# Altium PCB LittleWing++.PcbDoc (part 2 of 2)
Units mil, origin at the board's own origin, x right, y up, seen from the top; angles counter-clockwise.
Board outline 4200 x 2200 mil, 6 copper layers (L1 - Signal, L2 - Ground, L3 - Power, L4 - Signal, L5 - Ground, L6 - Signal), stack 60.567 mil thick; 70 components, 84 nets, 372 pads, 438 vias.
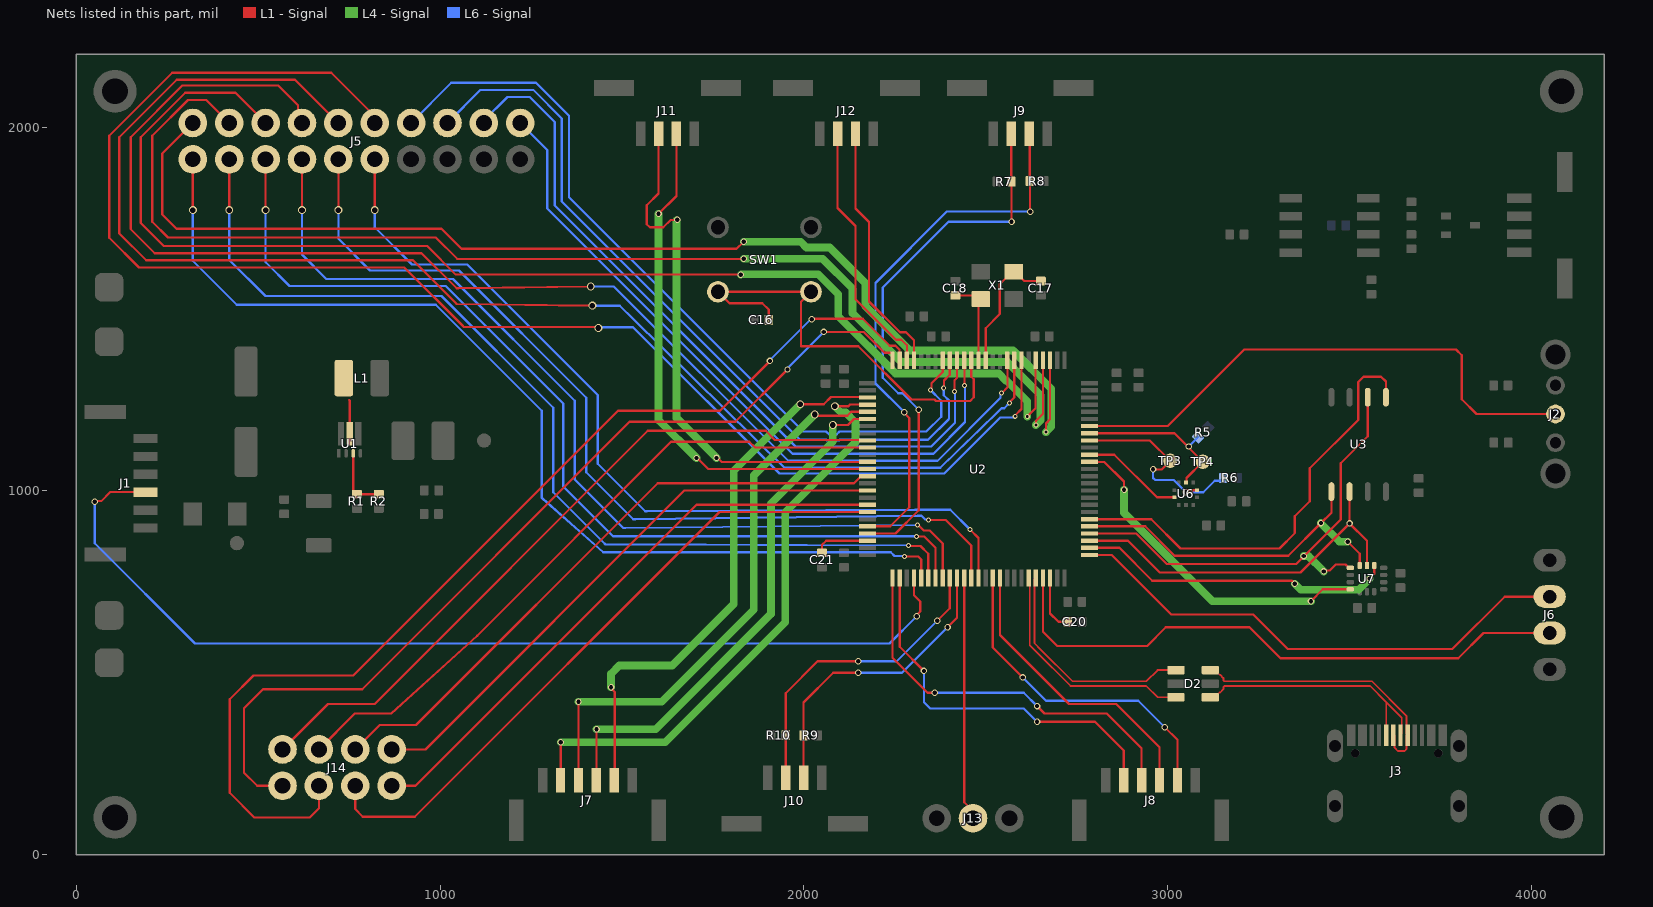
[diagram p6: the nets of this part, all layers, seen from the top]

## Via types
v1: diameter 17.72, hole 11.81, L1 - Signal to L6 - Signal, tented both sides, 240 vias
v2: diameter 21.65, hole 15.75, L1 - Signal to L6 - Signal, tented both sides, 158 vias
v3: diameter 17.72, hole 11.81, L1 - Signal to L6 - Signal, 20 vias
v4: diameter 13.78, hole 7.87, L1 - Signal to L6 - Signal, tented both sides, 20 vias

## Nets (pads, with @x,y where several pads share a name; then routed paths per layer and width w, separated by ;. In a path a pad name is that pad's centre, name@x,y a point inside that pad or via, vN(x,y) a via of type N, cw(c..) or ccw(c..) an arc to the next point about the centre after c; other vN are vias at no path point) (continued)
GPIO_5: J5.5 U2.63 | length 2421.8
  L1 - Signal w6.16: v2(820.28,1771.65) J5.5@820.28,1911.42 ; v4@2457.08,893.32 2480,870.39 U2.63@2480,760.79
  L6 - Signal w6.16: v2(820.28,1771.65) 820.28,1724.41 922.64,1622.05 1074.8,1622.05 1433.07,1263.78 1433.07,1074.8 1563.81,944.06 1568.92,944.06 2305.32,947.82 2305.35,947.86 2329.72,947.86 2329.8,947.78 2402.61,947.78 v4(2456.69,893.7)
GPIO_6: J5.6 U2.62 | length 2520.6
  L1 - Signal w6.16: v2(720.28,1771.65) J5.6@720.28,1911.42 ; v4(2342.52,919.95) 2390.05,919.95 2460.31,849.69 U2.62@2460.31,760.79
  L6 - Signal w6.16: 720.28,1704.72 v2(720.28,1771.65) ; 720.47,1704.72 720.47,1692.91 807.5,1605.89 1051.59,1605.89 1401.57,1255.91 1401.57,1051.18 1531,921.75 1536.11,921.75 2312.05,931.69 2323.03,931.7 2333.32,921.41 2341.06,921.41 v4(2342.52,919.95)
GPIO_7: J5.7 U2.58 | length 2577
  L1 - Signal w6.16: v2(620.28,1771.65) J5.7@620.28,1911.42 ; v4(2312.38,905.98) 2314.59,905.98 2329.57,891 2346,891 2381.57,855.42 U2.58@2381.57,760.79
  L6 - Signal w6.16: v2(620.28,1771.65) 620.28,1649.61 687.2,1582.68 1035.43,1582.68 1370.08,1248.03 1370.08,1031.5 1502.13,899.44 1503.94,897.64 1509.04,897.64 v4(2312.38,905.98)
GPIO_8: J5.8 U2.57 | length 2666.1
  L1 - Signal w6.16: v2(520.28,1771.65) J5.8@520.28,1911.42 ; v4(2309.77,874.43) 2331.11,874.43 2361.89,843.65 U2.57@2361.89,760.79
  L6 - Signal w6.16: v2(520.28,1771.65) 520.28,1628.74 586.02,1562.99 1015.75,1562.99 1338.58,1240.16 1338.58,1011.81 1475.07,875.33 2308.87,875.33 v4(2309.77,874.43)
GPIO_9: J5.9 U2.56 | length 2734
  L1 - Signal w6.16: v2(420.28,1771.65) J5.9@420.28,1911.42 ; v4(2287.13,849.61) 2288.02,848.71 2320.58,848.71 2342.2,827.09 U2.56@2342.2,760.79
  L6 - Signal w6.16: v2(420.28,1771.65) 420.28,1634.84 519.69,1535.43 1003.94,1535.43 1311.02,1228.35 1311.02,996.06 1452.26,854.82 1454.07,853.02 v4(2287.13,849.61)
GPIO_10: J5.10 U2.55 | length 2807
  L1 - Signal w6.16: v2(320.28,1771.65) J5.10@320.28,1911.42 ; v4(2276.78,819.69) 2314.16,819.69 2322.52,811.34 U2.55@2322.52,760.79
  L6 - Signal w6.16: v2(320.28,1771.65) 320.28,1632.48 440.94,1511.81 988.19,1511.81 1279.53,1220.47 1279.53,981.32 1281.33,979.52 1281.46,979.39 1448,831 2239,831 2249,821 2275.48,821 v4(2276.78,819.69)
GPIO_11: J5.11 U2.3 | length 3309.7
  L1 - Signal w6.16: J5.11@320.28,2011.42 236.22,1927.36 236.22,1759.84 275.59,1720.47 1003.94,1720.47 1059.06,1665.35 1814.96,1665.35 v3(1834.65,1685.04) ; v4(2665.35,1161.42) 2665.35,1185.04 2676.85,1196.53 U2.3@2676.85,1359.21
  L4 - Signal w21.18: v3(1834.65,1685.04) 1990.96,1685.04 2007.02,1668.98 2071.18,1668.98 2169.29,1570.87 2169.29,1507.87 2291.34,1385.83 2574.8,1385.83 2680,1280.63 2680,1176.06 v4(2665.35,1161.42)
GPIO_12: J5.12 U2.4 | length 3466.9
  L1 - Signal w6.16: J5.12@420.28,2011.42 356.89,2074.8 307.09,2074.8 208.66,1976.38 208.66,1740.16 251.97,1696.85 988.19,1696.85 1047.24,1637.8 v3(1834.65,1637.8) ; v4(2637.8,1181.1) 2637.8,1192.9 2657.16,1212.27 U2.4@2657.16,1359.21
  L4 - Signal w21.18: v3(1834.65,1637.8) 2051.18,1637.8 2133.86,1555.12 2133.86,1488.19 2267.72,1354.33 2559.06,1354.33 2650.7,1262.69 2650.7,1194 v4(2637.8,1181.1)
GPIO_13: J5.13 U2.5 | length 3546.3
  L1 - Signal w6.16: J5.13@520.28,2011.42 437.2,2094.49 299.21,2094.49 177.17,1972.44 177.17,1736.22 240.16,1673.23 964.57,1673.23 1043.31,1594.49 v3(1826.77,1594.49) ; v4(2614.17,1204.47) 2626.82,1217.37 2630.43,1220.98 2636.78,1227.33 2636.78,1358.51 U2.5@2637.48,1359.21
  L4 - Signal w21.18: v3(1826.77,1594.49) 1827.68,1595.39 2039.63,1595.39 2094.49,1540.53 2094.49,1480.32 2251.97,1322.83 2535.43,1322.83 2555.12,1303.15 2557.17,1303.15 2614.17,1246.15 2614.17,1204.69 v4(2614.17,1204.47)
GPIO_14: J5.14 U2.9 | length 3687.6
  L1 - Signal w6.16: J5.14@620.28,2011.42 609.26,2022.43 609.26,2060.03 555.12,2114.17 291.34,2114.17 149.61,1972.44 149.61,1719.58 215.65,1653.54 948.82,1653.54 1045.44,1556.92 1050.54,1556.92 v2(1414,1562) ; v4(2543.71,1268.58) 2560,1284.86 2560,1357.95 U2.9@2558.74,1359.21
  L6 - Signal w6.16: v2(1414,1562) 1477.37,1562 1956.69,1082.68 2367.68,1082.68 2540.75,1255.75 2540.75,1265.61 v4(2543.71,1268.58)
GPIO_15: J5.15 U2.8 | length 3887
  L1 - Signal w6.16: J5.15@720.28,2011.42 601.36,2130.33 276,2130.33 118.11,1972.44 118.11,1707.77 192.03,1633.86 925.2,1633.86 1043.49,1515.56 1045.26,1513.79 v2(1418.53,1509.17) ; v4(2565.52,1241.38) 2565.52,1243.96 2578.43,1256.86 U2.8@2578.43,1359.21
  L6 - Signal w6.16: v2(1418.53,1509.17) 1494,1509.17 1530.32,1472.85 1946.61,1063.82 2372.29,1063.82 2374.84,1063.82 2532.01,1216.28 2543.08,1227.35 2551.17,1227.35 2565.21,1241.38 v4(2565.52,1241.38)
GPIO_16: J5.16 U2.7 | length 4137.1
  L1 - Signal w6.16: J5.16@820.28,2011.42 820.28,2030.12 700.79,2149.61 263.78,2149.61 90.55,1976.38 90.55,1695.96 172.34,1614.17 901.57,1614.17 1062.78,1452.97 1065,1450.74 1432.26,1450.74 v2(1435,1448) ; v4(2580.95,1205) 2580.95,1207.62 2598.11,1224.78 U2.7@2598.11,1359.21
  L6 - Signal w6.16: v2(1435,1448) 1436.96,1449.96 1530.35,1449.96 1932.66,1047.66 2386.24,1047.66 2540.62,1202.04 2577.98,1202.04 v4(2580.95,1205)
GPIO_17: J5.17 U2.18 | length 2236.1
  L1 - Signal w6.16: v4(2348,1277) 2350.96,1279.96 2350.96,1295.96 2381.57,1326.57 U2.18@2381.57,1359.21
  L6 - Signal w6.16: J5.17@920.28,2011.42 1030.91,2122.05 1263.78,2122.05 1354.33,2031.5 1354.33,1807.09 1998.2,1163.22 2061.08,1163.22 2068.95,1155.35 2090.26,1155.35 2098.13,1163.22 2336.45,1163.22 2377.33,1204.1 2377.33,1247.67 v4(2348,1277)
GPIO_18: J5.18 U2.17 | length 2147.7
  L1 - Signal w6.16: v4(2384.39,1283.15) 2385.22,1283.98 2385.22,1303.22 2401.26,1319.26 U2.17@2401.26,1359.21
  L6 - Signal w6.16: J5.18@1020.28,2011.42 1111.22,2102.36 1255.91,2102.36 1334.65,2023.62 1334.65,1795.28 1986.38,1143.54 1989.66,1140.26 2061.19,1140.26 2062.26,1139.19 2096.95,1139.19 2098.02,1140.26 2341.05,1140.26 2397.31,1196.52 2399.11,1198.32 2399.11,1248.74 2384.78,1263.08 2384.78,1282.76 v4(2384.39,1283.15)
GPIO_19: J5.19 U2.16 | length 2063.1
  L1 - Signal w6.16: v4(2414.42,1272.94) 2414.42,1304.42 2420.94,1310.95 U2.16@2420.94,1359.21
  L6 - Signal w6.16: J5.19@1120.28,2011.42 1120.28,2017.91 1185.04,2082.68 1246.44,2082.68 1314.96,2014.15 1314.96,1784.23 1977.14,1122.05 2350.39,1122.05 2415.27,1186.93 2415.27,1272.09 v4(2414.42,1272.94)
GPIO_20: J5.20 U2.15 | length 1900.1
  L1 - Signal w6.16: U2.15@2440.63,1359.21 2441.33,1338.67 v4(2441.33,1289.61)
  L6 - Signal w6.16: J5.20@1220.28,2011.42 1294.45,1937.24 1294.45,1776.42 1968.5,1102.36 2356.04,1102.36 2443.04,1189.37 2443.04,1287.89 v4(2441.33,1289.61)
I2C1_SCL: R6.1 TP3.1 U2.92 U6.2 | length 584.8
  L1 - Signal w6.16: U2.92@2785.12,1138.74 2951.02,1138.74 TP3.1@3007.09,1082.68 2983.46,1059.06 v3(2959.84,1059.06) ; v3(3050.39,996.06) 3056.3,1001.97 U6.2@3081.39,1001.97
  L6 - Signal w6.16: v3(2959.84,1059.06) 2959.84,1035.43 2965.62,1029.66 3016.8,1029.66 v3(3050.39,996.06) 3097.64,996.06 3129.26,1027.69 3145.01,1027.69 R6.1@3152.76,1035.43
I2C1_SDA: R5.1 TP4.1 U2.93 U6.4 | length 456.4
  L1 - Signal w6.16: U2.93@2785.12,1158.43 3018.58,1158.43 TP4.1@3096.85,1080.16 3052,1035.31 3052,1024.73 U6.4@3050.39,1023.13
  L6 - Signal w6.16: v3(3058.27,1122.05) R5.1@3083.72,1147.5
I2C2_SCL: J9.2 R8.1 U2.46 | length 1513
  L1 - Signal w6.16: U2.46@2174.88,902.52 2237.36,902.52 2289.57,954.72 2289.57,1200.56 2275.59,1214.53 v3(2275.59,1216.54) ; J9.2@2619.61,1981.7 2621.26,1980.05 R8.1@2621.26,1851.38 2621.65,1850.98 2621.65,1768.11 v1(2622.05,1767.72)
  L6 - Signal w6.16: v3(2275.59,1216.54) 2196.85,1295.28 2196.85,1571.65 2392.91,1767.72 v1(2622.05,1767.72)
I2C2_SDA: J9.3 R7.1 U2.47 | length 1499.2
  L1 - Signal w6.16: U2.47@2174.88,882.84 2252.13,882.84 2316,946.71 v3(2316,1223) ; J9.3@2570.39,1981.7 2570.08,1981.39 R7.1@2570.08,1850.39 2570.47,1850 2570.47,1740.55 v1(2570.87,1740.16)
  L6 - Signal w6.16: v3(2316,1223) 2270.88,1268.12 2259.44,1268.12 2216.54,1311.02 2216.54,1559.05 2397.64,1740.16 v1(2570.87,1740.16)
I2C4_SCL: J10.2 R10.1 U2.59 | length 861.4
  L1 - Signal w6.16: J10.2@1950.39,213.85 1950,214.24 R10.1@1950,328.74 1950,443.9 2037.6,531.5 v1(2149.61,531.5) ; v1(2366.34,642.72) 2401.26,677.64 U2.59@2401.26,760.79
  L6 - Signal w6.16: v1(2149.61,531.5) 2255.12,531.5 v1(2366.34,642.72)
I2C4_SDA: J10.3 R9.1 U2.60 | length 832.6
  L1 - Signal w6.16: J10.3@1999.61,213.85 1999.21,214.24 R9.1@1999.21,327.76 1999.21,418.31 2080.91,500 v1(2149.61,500) ; v1(2395,625) 2420.94,650.94 U2.60@2420.94,760.79
  L6 - Signal w6.16: v1(2149.61,500) 2270,500 v1(2395,625)
IMU_INT: U2.89 U7.4 | length 939.2
  L1 - Signal w6.16: U2.89@2785.12,1079.68 2826.02,1079.68 2880.12,1025.59 v3(2880.12,1002.95) ; v1(3393.9,696.85) 3426.38,729.33 U7.4@3502.17,729.33
  L4 - Signal w21.18: v3(2880.12,1002.95) 2880.12,939.96 3123.23,696.85 v1(3393.9,696.85)
MCU_BOOT: J2.COM U2.94 | length 1512.8
  L1 - Signal w6.16: U2.94@2785.12,1178.11 3000.16,1178.11 3210.83,1388.78 3792.52,1388.78 3808.27,1373.03 3808.27,1251.97 3848.94,1211.3 J2.COM@4066.22,1211.3
MCU_RST: C16.2 SW1.2 U2.14 | length 1251.2
  L1 - Signal w6.16: C16.2@1903.15,1470.04 1903.15,1498.43 1885.83,1515.75 1795.28,1515.75 SW1.2@1763.78,1547.24 SW1.2@2019.69,1547.24 1992.13,1519.69 1992.13,1397.64 2149.61,1397.64 2296.12,1251.12 2359.25,1251.12 2363.15,1247.23 2457.23,1247.23 2467.05,1257.05 2467.05,1306.86 2460.31,1313.59 U2.14@2460.31,1359.21
OSC_IN: C17.2 U2.12 X1.1 | length 362.1
  L1 - Signal w6.16: U2.12@2499.69,1359.21 2499.69,1447.32 2538.3,1485.93 2538.3,1553.17 2538.58,1553.45 2538.58,1567.72 2573.03,1602.17 X1.1@2576.97,1602.17 2580.91,1602.17 2606.02,1577.05 C17.2@2651.42,1577.05
OSC_OUT: C18.2 U2.13 X1.3 | length 245
  L1 - Signal w6.16: C18.2@2416.42,1537.36 2476.42,1537.36 X1.3@2486.42,1527.36 2480,1520.94 U2.13@2480,1359.21
PRESS_INT: U2.90 U6.7 | length 282.9
  L1 - Signal w6.16: U2.90@2785.12,1099.37 2853.46,1099.37 2970.67,982.16 2993.76,982.16 2993.89,982.28 U6.7@3019.39,982.28
REG_FB: R1.1 R2.2 U1.3 | length 177.5
  L1 - Signal w6.16: U1.3@761.22,1103.23 761.22,999.48 769.95,990.75 R1.1@771.38,990.75 R2.2@831.38,990.75
REG_SW: L1.1 U1.6 | length 94.2
  L1 - Signal w6.16: 750,1250 751.38,1248.62 U1.6@751.38,1156.38
SPI1_CS: J7.5 U2.28 | length 1522.2
  L1 - Signal w6.16: v1(1470,460) 1470,456.87 1480,446.87 1480,216.3 J7.5@1478.82,215.12 ; v2(1990,1238.19) 2054.46,1238.19 2074.5,1258.23 2173.51,1258.23 U2.28@2174.88,1256.85
  L4 - Signal w21.18: v1(1470,460) 1470,497.59 1492.41,520 1638.11,520 1807.09,688.98 1807.09,1055.28 v2(1990,1238.19)
SPI1_MISO: J7.3 U2.30 | length 1559.6
  L1 - Signal w6.16: J7.3@1380.39,204.39 v1(1380.39,420) ; v2(2030,1210) 2034.19,1210 2037.4,1206.79 2119.55,1206.79 2130.24,1217.48 U2.30@2174.88,1217.48
  L4 - Signal w21.18: v1@1380,420 1608.98,420 1862.2,673.23 1862.2,1042.2 v2(2030,1210)
SPI1_MOSI: J7.4 U2.31 | length 1443.6
  L1 - Signal w6.16: J7.4@1429.61,204.39 1430,204.79 v1(1430,345) ; v2(2079.61,1181.07) 2121.07,1181.07 2137.8,1197.8 U2.31@2174.88,1197.8
  L4 - Signal w21.18: v1(1430,345) 1593.03,345 1909.45,661.42 1909.45,964.57 2079.61,1134.72 v2(2079.61,1181.07)
SPI1_SCK: J7.2 U2.29 | length 1644.2
  L1 - Signal w6.16: J7.2@1331.18,215.12 1331.89,215.83 v1(1331.89,309.06) ; v2(2085.15,1232.51) 2122.41,1232.51 2127.07,1237.16 U2.29@2174.88,1237.16
  L4 - Signal w21.18: v1(1331.89,309.06) 1619.29,309.06 1948.82,638.58 1948.82,940.94 2141.73,1133.86 2141.73,1188.98 2114.31,1216.4 2101.39,1216.4 2085.28,1232.51 v2(2085.15,1232.51)
SPI3_MISO: U2.79 U3.2 U7.1 | length 1299.8
  L1 - Signal w6.16: U2.79@2785.12,882.84 2913.62,882.84 2997.24,799.21 3353.54,799.21 3475.59,921.26 3475.59,1075.79 3550.2,1150.39 U3.2@3550.2,1257.48 ; v1(3429.33,778.54) 3431.54,780.75 3445.2,780.75 3461.82,797.37 3489.24,797.37 3498.23,788.39 U7.1@3502.17,788.39
  L4 - Signal w21.18: v1(3374.21,820.87) 3387.01,820.87 v1(3429.33,778.54)
SPI3_MOSI: U2.80 U3.5 U7.14 | length 979.4
  L1 - Signal w6.16: U2.80@2785.12,902.52 2938.23,902.52 3018.9,821.85 3331.89,821.85 v1(3421.46,911.42) 3450.2,940.16 U3.5@3450.2,998.03 ; v1(3495.28,860.24) 3528.35,827.17 U7.14@3528.35,794.88
  L4 - Signal w21.18: v1(3421.46,911.42) 3472.64,860.24 v1(3495.28,860.24)
SPI3_SCK: U2.78 U3.6 U7.13 | length 1030.2
  L1 - Signal w6.16: U2.78@2785.12,863.15 2890.98,863.15 2978.54,775.59 3365.35,775.59 v1(3500.2,910.43) ; U3.6@3500.2,998.03 v1(3500.2,910.43) ; U7.13@3548.03,794.88 3548.03,862.6 v1(3500.2,910.43)
SPI_CS1: U2.81 U3.1 | length 1234.1
  L1 - Signal w6.16: U2.81@2785.12,922.2 2954.96,922.2 3035.63,841.54 3307.28,841.54 3349.61,883.86 3349.61,930.12 3390.94,971.46 3390.94,1062.01 3523.82,1194.88 3523.82,1299.21 3538.58,1313.98 3586.81,1313.98 3600.2,1300.59 U3.1@3600.2,1257.48
SPI_CS2: U2.77 U7.12 | length 871.5
  L1 - Signal w6.16: U2.77@2785.12,843.46 2867.36,843.46 2957.87,752.95 3341.73,752.95 v1(3349.61,745.08) ; v1(3555.31,758.86) 3555.31,759.65 3567.72,772.05 U7.12@3567.72,794.88
  L4 - Signal w21.18: v1(3349.61,745.08) 3366.1,728.58 3525.04,728.58 v1(3555.31,758.86)
SWD_SWCLK: J6.3 U2.76 | length 1432.2
  L1 - Signal w6.16: U2.76@2785.12,823.78 2846.22,823.78 3010,660 3235,660 3330,565 3782.72,565 3926.97,709.25 J6.3@4050.39,709.25
SWD_SWDIO: J6.2 U2.72 | length 1642.4
  L1 - Signal w6.16: U2.72@2657.16,760.79 2657.16,612.84 2696.18,573.82 2943.82,573.82 2995,625 3225,625 3310,540 3799.06,540 3868.31,609.25 J6.2@4050.39,609.25
TIM1_PWM1: J14.4 U2.41 | length 1603
  L1 - Signal w6.16: J14.4@866.73,289.17 959.65,289.17 1671.42,1000.94 U2.41@2174.88,1000.94
TIM1_PWM2: J14.5 U2.43 | length 1628.1
  L1 - Signal w6.16: J14.5@866.73,189.17 932.48,189.17 1704.88,961.58 U2.43@2174.88,961.58
TIM1_PWM3: J14.3 U2.39 | length 1719.3
  L1 - Signal w6.16: J14.3@766.73,289.17 833.86,356.3 933.5,356.3 1598.2,1021 2137.85,1021 2157.17,1040.32 U2.39@2174.88,1040.32
TIM1_PWM4: J14.6 U2.44 | length 1827.7
  L1 - Signal w6.16: J14.6@766.73,189.17 766.73,125.2 787.6,104.33 930.32,104.33 1767.87,941.89 U2.44@2174.88,941.89
TIM2_PWM1: J14.8 U2.25 | length 2552.9
  L1 - Signal w6.16: J14.8@566.73,189.17 497.05,189.17 460.83,225.39 460.83,402.56 512.99,454.72 785.63,454.72 1520.91,1190 1811.26,1190 v1(1954.92,1333.66) ; v3(2054.33,1437.01) 2164.57,1437.01 2221.82,1379.75 2240.96,1379.75 2243.78,1376.93 U2.25@2243.78,1359.21
  L6 - Signal w6.16: v1@1953.94,1335.63 1953.94,1336.61 v3(2054.33,1437.01)
TIM2_PWM2: J14.7 U2.24 | length 2945.2
  L1 - Signal w6.16: J14.7@666.73,189.17 666.73,127.17 641.93,102.36 489.37,102.36 421.46,170.28 421.46,427.17 486.86,492.57 761.47,492.57 1488.9,1220 1769.41,1220 v1(1906.69,1357.28) ; v3(2021.85,1471.46) 2023.82,1473.43 2161.61,1473.43 2235.85,1399.19 2251.83,1399.19 2262.77,1388.25 2262.77,1359.91 U2.24@2263.47,1359.21
  L6 - Signal w6.16: v1@1903.74,1356.3 2018.9,1471.46 v3(2021.85,1471.46)
TIM3_PWM1: J14.2 U2.35 | length 1859
  L1 - Signal w6.16: J14.2@666.73,289.17 765.35,387.8 865.75,387.8 1101.64,601.65 1101.85,601.85 1635,1135 1850,1135 1865.94,1119.05 U2.35@2174.88,1119.05
TIM3_PWM2: J14.1 U2.34 | length 1981.8
  L1 - Signal w6.16: J14.1@566.73,289.17 691.93,414.37 820.08,414.37 1570.71,1165 1895,1165 1920,1140 2173.62,1140 U2.34@2174.88,1138.74
UART4_RX: J12.3 U2.23 | length 705.7
  L1 - Signal w6.16: J12.3@2092.72,1977.33 2092.72,1777.56 2141.93,1728.35 2141.93,1526.57 2253.15,1415.35 2267.91,1415.35 2283.15,1400.12 U2.23@2283.15,1359.21
UART4_TX: J12.2 U2.22 | length 694.6
  L1 - Signal w6.16: J12.2@2141.93,1977.33 2141.93,1776.57 2179.33,1739.17 2179.33,1520.67 2263.98,1436.02 2280.71,1436.02 2302.84,1413.9 U2.22@2302.84,1359.21
UART5_CTS: J8.4 U2.66 | length 793.6
  L1 - Signal w6.16: U2.66@2539.06,760.79 2539.06,603.86 2728.54,414.37 2858.46,414.37 2977.64,295.2 J8.4@2977.64,225
UART5_RTS: J8.5 U2.65 | length 894.7
  L1 - Signal w6.16: U2.65@2519.37,760.79 2519.37,569.41 v1(2601.57,487.2) ; v1(2992.32,350.39) 3026.85,315.87 J8.5@3026.85,225
  L6 - Signal w6.16: v1(2601.57,487.2) 2665.55,423.23 2919.49,423.23 v1(2992.32,350.39)
UART5_RX: J8.3 U2.51 | length 1074.6
  L1 - Signal w6.16: U2.51@2243.78,760.79 2243.78,541.22 2340,445 v1(2360,445) ; v1(2640.94,408.46) 2661.61,387.8 2832.87,387.8 2928.43,292.24 J8.3@2928.43,225
  L6 - Signal w6.16: v1(2360,445) 2604.41,445 v1(2640.94,408.46)
UART5_TX: J8.2 U2.52 | length 1034.7
  L1 - Signal w6.16: U2.52@2263.47,760.79 2263.47,571.54 v1(2330,505) ; v1(2640.94,365.16) 2800.39,365.16 2879.21,286.34 J8.2@2879.21,225
  L6 - Signal w6.16: v1(2330,505) 2330,419.21 2347.64,401.57 2604.53,401.57 v1(2640.94,365.16)
UART7_RX: J11.3 U2.37 | length 1473.5
  L1 - Signal w6.16: J11.3@1600.39,1976.7 1600.39,1817.72 1568.11,1785.43 1568.11,1733.27 1576.97,1724.41 1613.39,1724.41 1633.67,1744.69 1651.39,1744.69 v3(1651.77,1745.08) ; v1(1759.84,1090.55) 1762.9,1090.55 1774.17,1079.28 1976.64,1079.28 1977.05,1079.68 U2.37@2174.88,1079.68
  L4 - Signal w21.18: v3@1649.8,1743.11 1649.8,1200.59 v1(1759.84,1090.55)
  L6 - Signal w6.16: v3@1649.8,1743.11 v3(1651.77,1745.08)
UART7_TX: J11.2 U2.38 | length 1432.5
  L1 - Signal w6.16: v3(1600.59,1761.81) 1649.61,1810.83 J11.2@1649.61,1976.7 ; v1(1704.72,1090.31) 1707.13,1090.31 1735.64,1061.8 1737.44,1060 U2.38@2174.88,1060
  L4 - Signal w21.18: v3(1600.59,1761.81) 1600.59,1194.45 v1(1704.72,1090.31)
UART9_RX: J13.2 U2.61 | length 670.9
  L1 - Signal w6.16: U2.61@2440.63,760.79 2440.63,144.01 2465,119.64 J13.2@2465,100
USB_CONN_N: D2.1 J3.A7 J3.B7 | length 716.1
  L1 - Signal w4.88: D2.1@3117.24,432.6 3129.33,432.6 3142.48,445.75 3144.29,445.75 3153.31,454.77 3153.31,460.7 3156.17,463.56 3308.5,463.56 3556.46,463.56 3600.75,419.27 ; J3.B7@3600.75,329.88 3600.75,419.27 ; J3.A7@3640.12,329.88 3643.52,333.28 3643.52,376.5 3600.75,419.27
USB_CONN_P: D2.3 J3.A6 J3.B6 | length 765.1
  L1 - Signal w4.88: D2.3@3117.24,507.4 3129.33,507.4 3142.48,494.25 3144.29,494.25 3153.31,485.23 3153.31,479.3 3156.17,476.44 3313.84,476.44 3561.8,476.44 3656.4,381.84 3656.4,333.28 3659.8,329.88 3656.34,326.42 3656.34,289.8 3651.54,285 3632.68,285 3623.9,293.78 3623.9,326.42 J3.A6@3620.43,329.88
USBD_N: D2.6 U2.70 | length 647.4
  L1 - Signal w4.88: U2.70@2617.8,760.79 2621.2,757.39 2621.2,575.59 2636.34,560.45 2733.22,463.56 2941.44,463.56 2972.4,432.6 D2.6@3022.76,432.6
USBD_P: D2.4 U2.71 | length 626.1
  L1 - Signal w4.88: U2.71@2637.48,760.79 2634.08,757.39 2634.08,580.92 2650,565 2738.56,476.44 2941.44,476.44 2972.4,507.4 D2.4@3022.76,507.4
VCAP1: C20.2 U2.73 | length 155.8
  L1 - Signal w6.16: U2.73@2676.85,760.79 2676.85,662.91 2699.76,640 C20.2@2725.31,640
VCAP2: C21.2 U2.48 | length 151.8
  L1 - Signal w6.16: C21.2@2050,829.69 2050,851.97 2061.22,863.19 2174.84,863.19 U2.48@2174.88,863.15
VOLTAGE_DATA: J1.4 U2.54 | length 2777.8
  L1 - Signal w6.16: v1(50.39,970.47) 51.76,971.84 68.49,971.84 93.43,996.77 J1.4@181.5,996.77 ; U2.54@2302.84,760.79 2302.84,713.23 2320.21,695.86 2320.21,668.61 2310.24,658.64 v1(2310.24,655.51)
  L6 - Signal w6.16: v1(50.39,970.47) 50.39,856.3 325.98,580.71 2235.43,580.71 v1(2310.24,655.51)
pads on no net: D2.5 J1. J2.M1 J2.M2 J3.A4B9 J3.A5 J3.A8 J3.B4A9 J3.B5 J3.B8 J3.MH J4.5 J4.6 J7. J8. J9.5 J9.6 J10.5 J10.6 J11.5 J11.6 J12.5 J12.6 U1.2 U2.1 U2.2 U2.32 U2.33 U2.36 U2.40 U2.42 U2.45 U2.84 U2.85 U2.86 U2.87 U2.88 U2.97 U2.98

## Polygon pours and split planes (outlines as drawn)
+3V3 on L3 - Power "+3V3_L03_P006" (solid, pour order 6): 0,2200 4200,2200 4200,0 0,0
+5V on L3 - Power "+5V_L03_P001" (solid, pour order 1): 376.18,787.89 328.29,740 50,740 25,715 25,470 50,445 275,445 390,560 429.37,560 433.18,556.19 572.05,417.32 909.65,417.32 999.21,327.76 999.21,165.35 1101.57,62.99 2174.41,62.99 2334.84,223.43 2596.65,223.43 2756.1,63.98 3316.14,63.98 3427.36,175.2 3938.19,175.2 3986.42,223.43 3986.42,403.54 3935.24,454.72 3869.29,454.72 3856.5,441.93 3891.93,406.5 3891.93,267.72 3854.53,230.32 3365.35,230.32 3250.2,115.16 3033.66,115.16 2983.46,165.35 2755.12,165.35 2637.01,283.46 2311.22,283.46 2156.69,128.94 1209.84,128.94 1082.87,255.91 1082.87,348.43 947.05,484.25 738.39,484.25 485.43,737.2 485.43,927.17 524.8,966.54 638.98,966.54 652.76,980.32 652.76,1119.09 603.06,1119.09 569.09,1081.69 495.28,1081.69 376.18,962.6
+5V on L3 - Power "+5V_L03_P003" (solid, pour order 3): 3637.01,1489.17 3328.94,1489.17 3190.16,1627.95 2939.17,1627.95 2826.97,1740.16 2826.97,1926.18 2698.03,2055.12 1427.36,2055.12 1354.33,1960.63 1335.83,1939.96 1335.83,1840.55 1232.97,1745.57 1248.23,1667.32 1311.22,1667.32 1416.54,1772.64 1416.54,1887.8 1474.61,1945.87 2711.81,1945.87 2759.06,1898.62 2759.06,1668.31 2885.04,1542.32 3171.46,1542.32 3319.09,1394.68 3637.01,1394.68
+5V on L3 - Power "+5V_L03_P004" (solid, pour order 4): 652.76,1119.09 652.76,1191.93 638.98,1213.58 638.98,1221.46 638.98,1424.21 807.28,1592.52 1236.42,1592.52 1311.22,1667.32 1248.23,1730.32 1248.23,1752.95 1240.35,1752.95 1159.65,1672.24 723.62,1672.24 599.61,1548.23 603.06,1119.09 586.08,1100.39
+5V on L3 - Power "+5V_L03_P002" (solid, pour order 2): 3947.05,442.91 3886.02,503.94 3886.02,1000.98 3811.22,1075.79 3811.22,1385.83 3904.72,1479.33 3904.72,1557.09 3876.18,1585.63 3789.57,1585.63 3693.11,1489.17 3637.01,1489.17 3637.01,1394.68 3726.57,1305.12 3726.57,1086.61 3812.2,1000.98 3812.2,486.22 3871.26,427.17
GND on L2 - Ground "GND_L02_P005" (solid, pour order 5): 0,2200 4200,2200 4200,0 0,0
GND on L5 - Ground "GND_L05_P008" (solid, pour order 8): 0,2200 4200,2200 4200,0 0,0

## Keep-outs
Keep-Out Layer:
  the board outline again, w19.68

## Other copper
L1 - Signal:
  region net +5V: 390.94,977.36 406.69,993.11 406.69,1198.82 431.3,1223.43 712.8,1223.43 732.48,1202.76 732.48,1124.73 722.64,1112.2 722.64,912.4 717.72,907.48 713.78,907.48 638.98,907.48 586.81,959.65 535.63,959.65 513.98,937.99 513.98,856.3 484.45,826.77 406.69,826.77 390.94,842.52
  region net +3V3: 812.2,1387.8 830.71,1406.3 830.71,1437.01 771.65,1496.06 259.84,1496.06 181.1,1417.32 181.1,1374.02 145.67,1338.58 43.31,1338.58 25,1356.89 25,1603.74 43.31,1622.05 118.11,1622.05 173.23,1566.93 783.46,1566.93 834.65,1515.75 877.95,1515.75 919.49,1474.21 919.49,1387.8
  region net +5V: 27.56,716.54 51.18,740.16 157.48,740.16 192.91,704.72 192.91,480.32 161.42,448.82 51.18,448.82 27.56,472.44
  region net GND: 3545.55,730.57 3545.55,657.4 3553.35,649.61 3613.39,649.61 3626.18,662.4 3626.18,688.98 3603.54,711.61 3580.91,711.61 3574.02,718.5 3574.02,731.3 3545.47,731.3 3545.47,730.32
  region net GND: 3585.83,749.02 3613.39,749.02 3625.2,760.83 3667.52,760.83 3673.43,766.73 3673.43,826.77 3664.57,835.63 3600.59,835.63 3585.83,820.87 3585.83,793.31 3585.83,820.87 3585.83,793.31
  region net GND: 770.87,1129.92 770.87,1193.9 798.43,1221.46 890.94,1221.46 921.46,1190.94 921.46,1084.65 909.65,1072.83 834.84,1072.83 800.39,1107.28 800.39,1117.13 787.6,1129.92 771.85,1129.92
  region net GND: 521.85,1256.89 590.75,1325.79 590.75,1416.34 561.22,1445.87 384.06,1445.87 360.43,1422.24 360.43,1289.37 392.91,1256.89 415.55,1256.89
  region net GND: 965.75,1022.64 954.92,1033.46 912.6,1033.46 886.02,1006.89 886.02,973.43 877.17,964.57 815.16,964.57 807.28,956.69 807.28,904.53 778.74,875.98 639.96,875.98 595.67,920.28 595.67,930.12 581.89,943.9 540.55,943.9 531.69,935.04 531.69,796.26 563.19,764.76 864.37,764.76 965.75,866.14
  region net GND: 141.93,970.47 128.15,956.69 128.15,880.91 217.72,791.34 263.98,791.34 280.71,808.07 280.71,817.91 247.24,851.38 247.24,956.69 233.46,970.47 225.59,970.47
  region net +3V3: 2320.08,1347.44 2343.7,1347.44 2343.7,1389.76 2364.37,1410.43 2364.37,1445.87 2346.65,1463.58 2346.65,1533.46 2338.78,1541.34 2307.28,1541.34 2301.38,1535.43 2301.38,1507.87 2313.19,1496.06 2313.19,1432.09 2320.08,1425.2 2320.08,1346.46
  region net +3V3: 2766.93,1293.28 2818.08,1293.28 2834.84,1310.04 2939.17,1310.04 2942.13,1312.99 2942.13,1372.05 2930.31,1383.86 2852.56,1383.86 2835.83,1367.13 2835.83,1337.6 2800.39,1302.17 2766.93,1302.17
  region net +3V3: 2714.76,739.17 2733.46,720.47 2741.34,720.47 2752.17,709.65 2752.17,684.06 2755.12,681.1 2788.58,681.1 2798.43,690.94 2798.43,760.83 2773.82,785.43 2714.76,785.43 2714.76,784.45
  region net +3V3: 2097.64,798.23 2104.53,805.12 2137.99,805.12 2156.65,823.78 2191.18,823.78 2200.98,813.98 2200.98,726.38 2196.06,721.46 2122.24,721.46 2097.64,747.05 2097.64,748.03 2097.64,779.53
  region net +3V3: 2194.09,1279.53 2194.09,1273.35 2029.45,1273.35 2016.93,1260.83 1984.45,1260.83 1973.62,1271.65 1973.62,1305.12 1980.51,1311.02 1981.5,1311.02 2119.29,1311.02 2130.12,1300.2 2130.12,1289.37 2139.96,1279.53
  region net +3V3: 3531.69,731.3 3531.69,698.82 3527.76,694.88 3527.76,665.35 3517.91,655.51 3473.62,655.51 3464.76,664.37 3464.76,687.01 3486.42,708.66 3511.01,708.66 3522.83,720.49 3522.83,731.3
  region net +3V3: 3580.91,1036.42 3580.91,957.68 3594.69,943.9 3718.7,943.9 3734.45,959.65 3733.46,960.63 3733.46,1004.92 3726.57,1011.81 3639.96,1011.81 3626.18,1025.59 3626.18,1030.51 3620.28,1036.42
  region net +3V3: 3580.91,1562.99 3591.73,1573.82 3591.73,1662.4 3578.94,1675.2 3577.95,1674.21 3511.02,1674.21 3491.34,1654.53 3491.34,1575.79 3504.13,1562.99 3539.57,1562.99
  region net +3V3: 794.49,1370.08 812.2,1387.8 919.49,1387.8 958.86,1348.43 958.86,1278.54 1003.15,1234.25 1118.31,1234.25 1159.65,1192.91 1159.65,1026.57 1033.66,900.59 987.4,900.59 982.82,905.18 982.82,1049.86 954.92,1077.76 954.92,1179.13 896.85,1237.2 803.35,1237.2 794.49,1246.06
  region net +5VNFILT: 370.28,854.33 350.59,834.65 284.96,834.65 260.04,862.97 260.04,1060.04 240.35,1079.72 137.99,1079.72 130.12,1087.6 130.12,1164.37 142.91,1177.17 294.49,1177.17 351.57,1120.08 351.57,960.63 370.28,941.93 351.57,960.63 370.28,941.93
  region net REG_SW: 747.24,1130.91 747.24,1214.57 720.67,1241.14 704.92,1241.14 683.27,1262.8 683.27,1370.08 699.02,1385.83 766.93,1385.83 781.69,1371.06 781.69,1225.39 755.12,1198.82 755.12,1130.91

## Silkscreen, mask and mechanical layers (free items; w line width, h text height)
Top Overlay:
  drawing of 43 lines, arcs and shapes, not listed
  text "YelTigin / LittleWing++" at 2824.56,2023.05 h120
  text "+3V3" at 175.67,1565 h60 r270
  text "Y" at 3205,739.71 h60
  text "+5V" at 200.67,650 h60 r270
  text "X" at 3280,644.71 h60
  text "Z" at 3125,614.71 h60
  text "JLCJLCJLCJLC" at 3499.92,200.47 h45
Bottom Overlay:
  lines w5: 1250,145 1250,285 ; 1327.5,145 1327.5,284.35 ; 1415,145 1415,285 ; 1500,285 1502.5,282.5 1502.5,145 ; 1555,1840 1555,1970 ; 1575,145 1575,285 ; 1625,1840 1625,1970 ; 1690,1840 1690,1970 ; 1905,195 1905,325 ; 1970,195 1970,325 ; 2040,195 2040,325 ; 2045,1840 2045,1970 ; 2115,1840 2115,1970 ; 2180,1840 2180,1970 ; 2430,170 2430,300 ; 2495,170 2495,300 ; 2520,1841.25 2520,1971.25 ; 2590,1841.25 2590,1971.25 ; 2655,1841.25 2655,1971.25 ; 2800,190 2800,320 ; 2877.5,190 2877.5,320 ; 2965,190 2965,320 ; 3052.5,190 3052.5,320 ; 3125,190 3125,320 ; 3800,600 3826.25,600 3956.25,600 3990,600 ; 3800,664.83 3990,665.04 ; 3800,735 3990,735 ; 3935,1655 3955,1655 4085,1655 4105,1655 ; 3935,1790 4105,1790 ; 3936.81,1719.84 4105,1720.02 ; 1180,145 1180,285 1460,285 1645,285 1645,145 1180,145 ; 1490,1840 1754.91,1840 1755,1840.09 1755,1876.25 1755,1921.25 1755,1968.75 1753.75,1970 1490,1970 1490,1840 ; 1840,196.25 1840,243.75 1840,288.75 1840,324.91 1840.09,325 2105,325 2105,195 1841.25,195 1840,196.25 ; 1980,1840 2244.91,1840 2245,1840.09 2245,1876.25 2245,1921.25 2245,1968.75 2243.75,1970 1980,1970 1980,1840 ; 2365,170 2365,217.5 2365,262.5 2365,300 2560,300 2560,170 2365,170 ; 2455,1841.25 2455,1971.25 2718.75,1971.25 2720,1970 2720,1922.5 2720,1877.5 2720,1841.34 2719.91,1841.25 2455,1841.25 ; 2730,190 3195,190 3195,320 3010,320 2730,320 2730,190 ; 3800,535 3862.5,535 3907.5,535 3955,535 3991.25,535 3991.25,556.25 3991.25,800 3800,800 3800,535 ; 3935,1590 3935,1855 4105,1855 4105,1611.25 4105,1590 4083.75,1590 4036.25,1590 3991.25,1590 3935,1590
  text "TX" at 1640,1876.41 h50 r270
  text "TX" at 2130,1876.41 h50 r270
  text "RX" at 1575,1875.07 h50 r270
  text "RX" at 2065,1875.07 h50 r270
  text "SCL" at 2605.55,1866.25 h50 r270
  text "+5V" at 2670.55,1866.25 h50 r270
  text "+5V" at 1705.55,1865 h50 r270
  text "+5V" at 2195.55,1865 h50 r270
  text "SDA" at 2540.55,1861.25 h50 r270
  text "GND" at 1505.55,1856.96 h50 r270
  text "GND" at 1995.55,1856.96 h50 r270
  text "GND" at 2470.55,1856.25 h50 r270
  text "GND" at 3971.96,1839.45 h50 r180
  text "CAN-N" at 3950.32,1769.45 h50 r180
  text "CAN-P" at 3950.8,1704.45 h50 r180
  text "+5V" at 3980,1639.45 h50 r180
  text "ATABERK CELIK" at 1255.55,1500 h100
  text "1" at 3985,1300 h50 r90
  text "BOOT" at 3904.45,1275 h50 r90
  text "0" at 3984.45,1145 h50 r90
  text "GND" at 3854.68,784.45 h50 r180
  text "SWCLK" at 3815,714.45 h50 r180
  text "SWDIO" at 3820,649.45 h50 r180
  text "+3V3" at 3851.25,584.45 h50 r180
  text "GND" at 2089.45,310 h50 r90
  text "SDA" at 2019.45,305 h50 r90
  text "GND" at 3174.45,305 h50 r90
  text "+5V" at 1889.45,300 h50 r90
  text "SCL" at 1954.45,300 h50 r90
  text "CTS" at 3024.45,300 h50 r90
  text "RTS" at 3104.45,300 h50 r90
  text "+5V" at 2779.45,296.08 h50 r90
  text "RX" at 2938.11,286.01 h50 r90
  text "TX" at 2858.78,284.67 h50 r90
  text "GND" at 2544.45,283.04 h50 r90
  text "+5V" at 2414.45,275 h50 r90
  text "MOSI" at 1387.56,270.71 h50 r90
  text "MISO" at 1474.45,271.26 h50 r90
  text "RX" at 2480,264.93 h50 r90
  text "GND" at 1624.45,264.12 h50 r90
  text "SCK" at 1308.23,262.96 h50 r90
  text "+5V" at 1229.45,256.08 h50 r90
  text "CS" at 1554.45,245.53 h50 r90
Mechanical 1:
  the board outline again, w19.68

## Text inside footprints (layer, text, board x,y; h text height)
C1: Mechanical 13 "+" at 356.49,1074.48 h39.37 r90; Top Overlay "+" at 356.49,1074.48 h39.37 r90
U6: Mechanical 13 "*" at 3057.39,1007.28 h50 r180